# Allegro board radiotelescope.brd
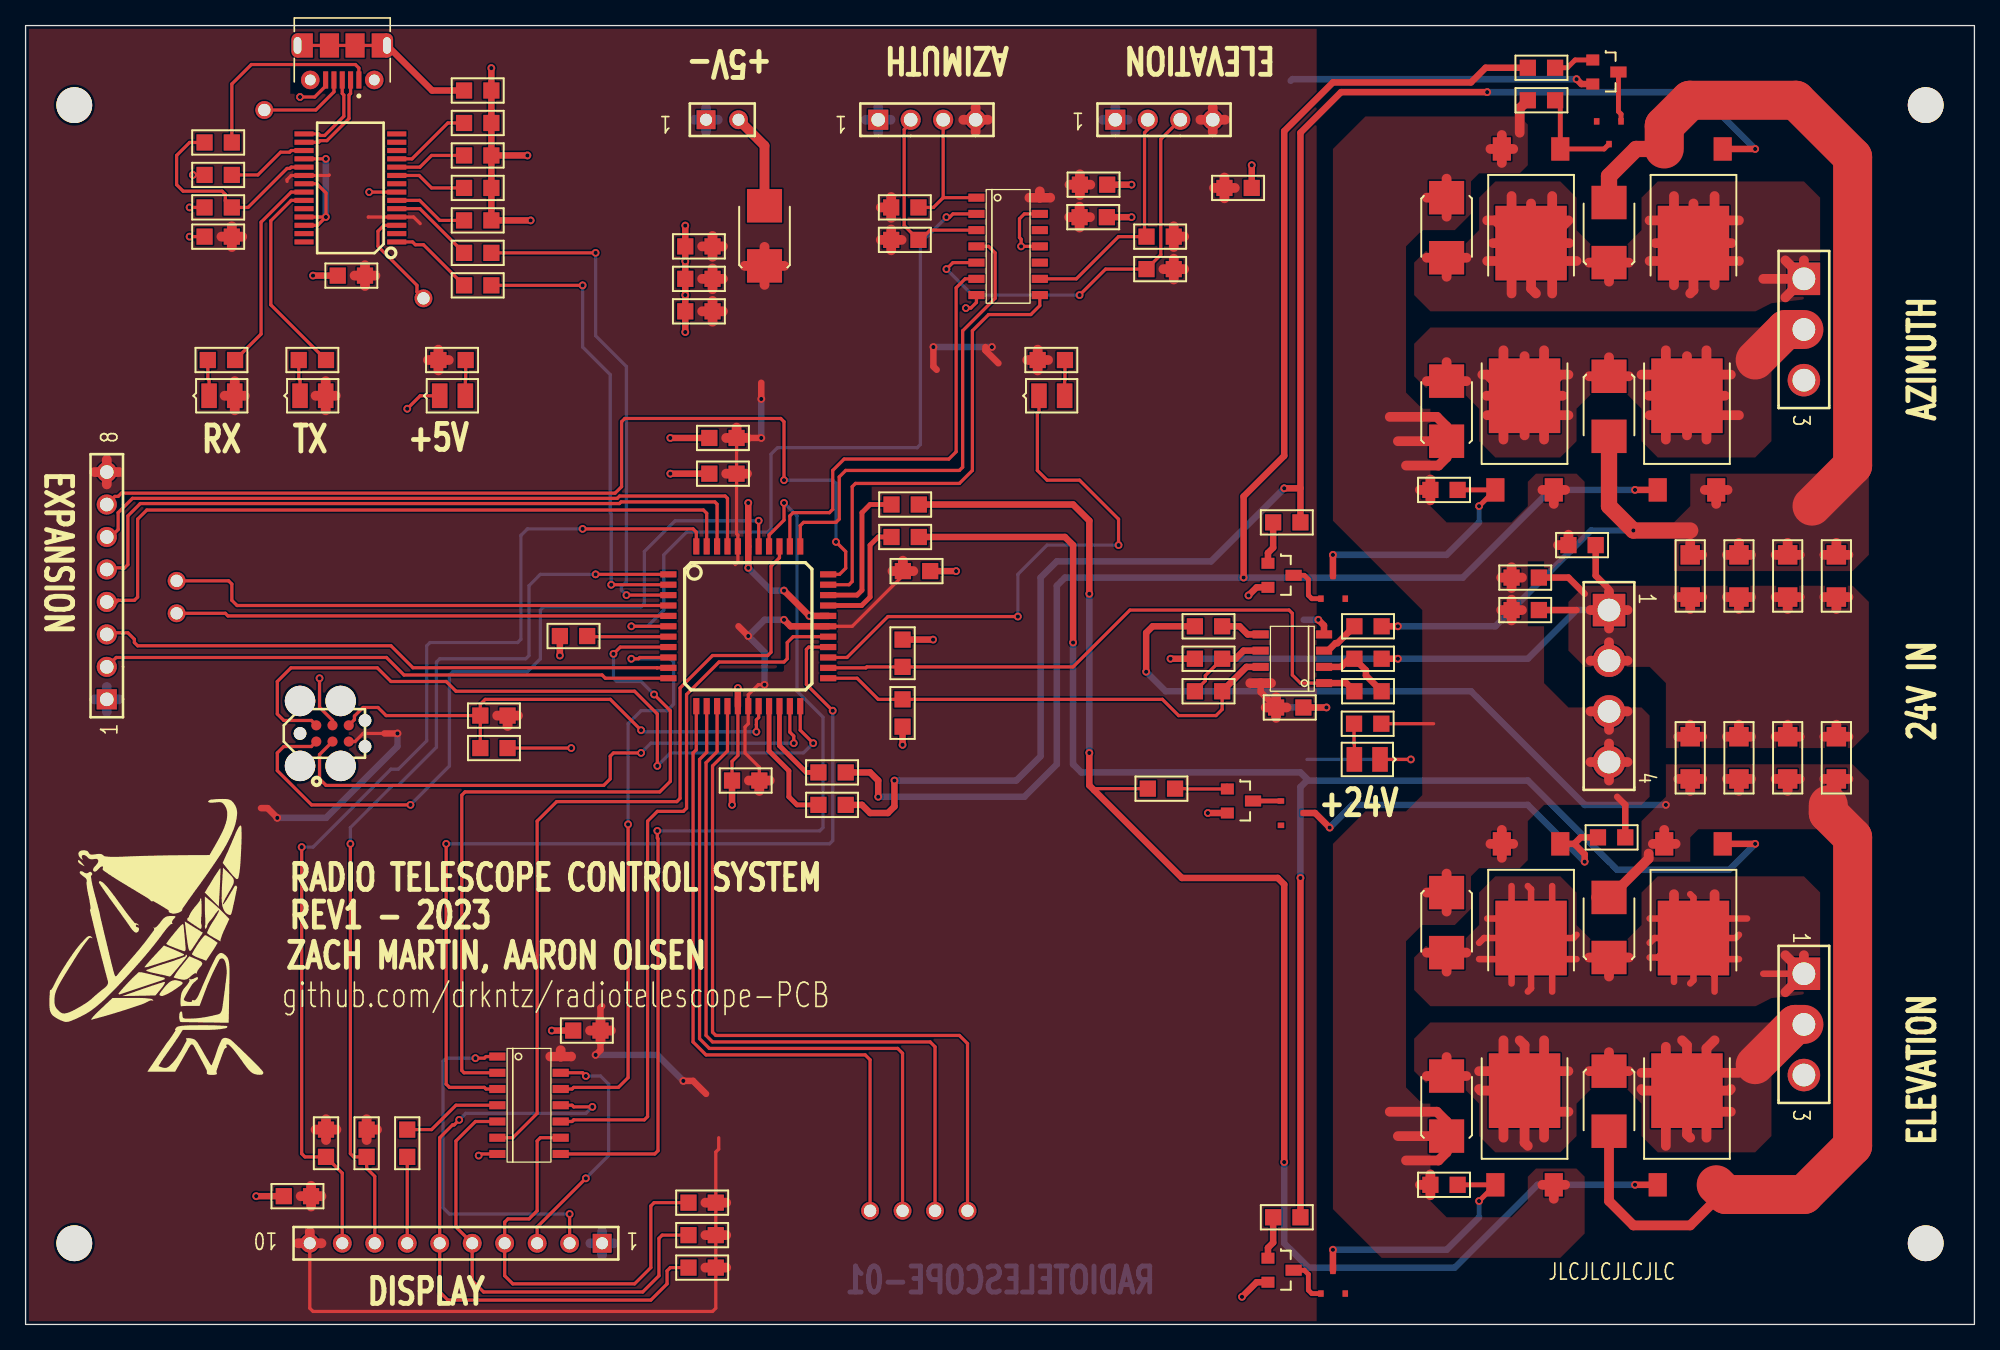
[diagram p0: board, top side]
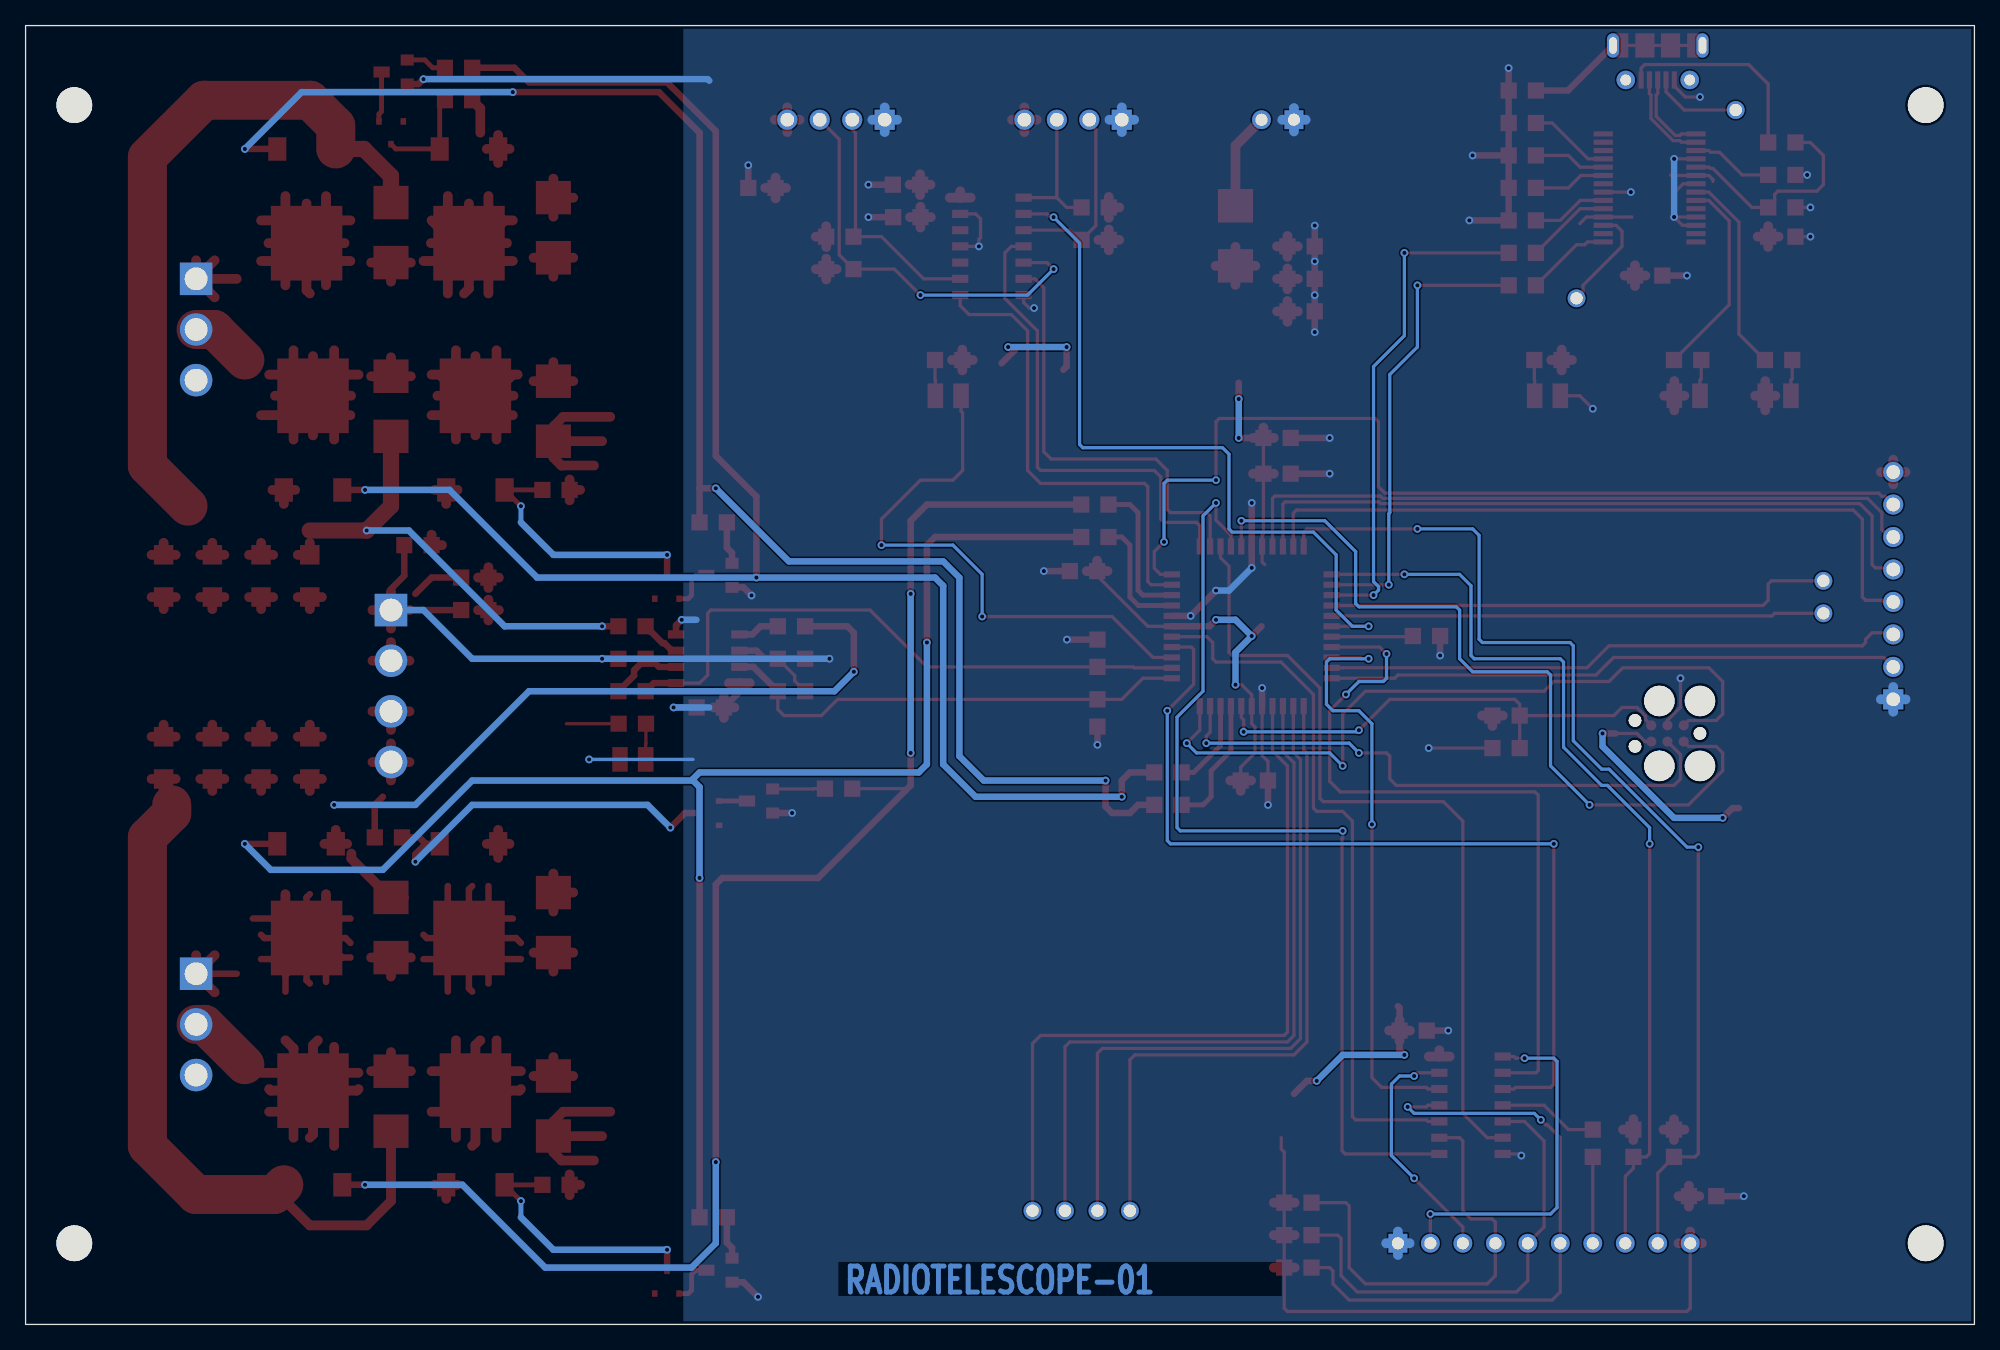
[diagram p1: board, bottom side, seen from below]

Outline 152.4 x 101.6 mm; copper layers: TOP, BOTTOM. Coordinates in mm from the lower left corner of the outline.
Outline path: rectangle 0,0 152.4,101.6

## Design rules (mm)
constraint set DEFAULT: min track width 0.152, pair gap 0.152
net group DP1: nets USB_D+ USB_D-
nets with their own width: min track width 0.508; nets AZ_CONTROL1

## Placement (name value [footprint] x y rotation side)
C1  10uF  [SMC0805]  95.88 88.9 180 top
C2  10uF  [SMC0805]  53.47 66.55 0 top
C3  100nF  [SMC0805]  53.47 69.34 0 top
C4  100nF  [SMC0805]  55.24 42.54 0 top
C5  100nF  [SMC0805]  70.74 58.93 180 top
C6  10uF  [SMC0805]  41.78 53.85 0 top
C7  100n  [SMC0805]  35.56 45.08 0 top
C8  10uF  [SMC0805]  84.58 89.15 180 top
C9  10uF  [SMC0805]  20.19 10.03 0 top
C10  100nF  [SMC0805]  26.54 82.04 180 top
C11  10uF  [SMC0805]  16.13 85.09 180 top
C12  100n  [SMC0805]  16.13 89.92 180 top
C13  100n  [SMC0805]  97.79 48.26 0 top
C14  100n  [SMC0805]  68.58 51.43 90 top
C15  100n  [SMC0805]  68.58 48.89 270 top
C16  100n  [SMC0805]  44.96 22.99 180 top
C17  100n  [SMC0805]  82.42 86.61 0 top
C20  10uF  [SMC0805]  53.72 79.25 180 top
C21  10uF  [SMC0805]  53.72 81.79 180 top
C22  10uF  [SMC0805]  53.72 84.33 180 top
C23  10uF  [SMC0805]  120.65 60.96 0 top
C24  10uF  [SMC0805]  116.2 58.42 0 top
C25  10uF  [SMC0805]  116.2 55.88 0 top
D1  RED  [SMD0805]  79.25 72.64 0 top
D2  RED  [SMD0805]  21.46 72.64 0 top
D3  RED  [SMD0805]  14.35 72.64 0 top
D4  BZX84C5V1/SOT  [SOT23]  123.83 93.22 270 top
D7  BZX84C5V1/SOT  [SOT23]  102.23 57.66 90 top
D10  BZX84C5V1/SOT  [SOT23]  99.06 40 0 top
D13  BZX84C5V1/SOT  [SOT23]  102.23 3.3 90 top
D17  SK24-TP  [SMDO214AA]  57.78 82.8 90 top
D18  GREEN  [SMD0805]  32.38 72.64 0 top
D19  SK24-TP  [SMDO214AA]  111.12 33.78 270 top
D20  SK24-TP  [SMDO214AA]  111.12 88.14 270 top
D21  SK24-TP  [SMDO214AA]  111.12 69.09 90 top
D22  SK24-TP  [SMDO214AA]  123.83 83.06 90 top
D23  SK24-TP  [SMDO214AA]  123.83 74.17 270 top
D24  SK24-TP  [SMDO214AA]  111.12 14.73 90 top
D25  SK24-TP  [SMDO214AA]  123.83 28.7 90 top
D26  SK24-TP  [SMDO214AA]  123.83 19.81 270 top
D27  GREEN  [SMD0805]  105.92 44.2 180 top
J1  TC2030-IDC-NL  [TAG_TC2030-IDC-NL]  24 46.23 0 top
J2  4-MTA-100  [BLKCON100VHTM1SQSW1004]  66.67 94.23 0 top
J3  4-MTA-100  [BLKCON100VHTM1SQSW1004]  85.22 94.23 0 top
J4  CON10  [BLKCON100VHTM1SQW10010]  45.09 6.35 180 top
J5  1050170001  [MOLEX_1050170001]  24.77 99.69 180 top
J6  3-MTA-156  [BLKCON156VHTM1SQSW1563]  139.06 81.79 270 top
J7  4-MTA-156  [BLKCON156VHTM1SQSW1564]  123.83 55.88 270 top
J8  3-MTA-156  [BLKCON156VHTM1SQSW1563]  139.06 27.43 270 top
J9  2-MTA-100  [BLKCON100VHTM1SQW1002]  53.21 94.23 0 top
J10  SPARE  [BLKCON100VHTM1SQSW1008]  6.35 48.89 90 top
NOREF  -  [unnamed]  148.59 6.35 0 top
NOREF#2  -  [unnamed]  3.81 6.35 0 top
NOREF#3  -  [unnamed]  3.81 95.38 0 top
NOREF#4  -  [#2]  0 0 90 top
NOREF#5  -  [#2]  0 101.6 0 top
NOREF#6  -  [#2]  0 101.6 0 top
NOREF#7  -  [#2]  0 0 90 top
NOREF#8  -  [#2]  11.81 29.97 0 top
NOREF#9  -  [#2]  0 0 90 top
NOREF#10  -  [unnamed]  148.59 95.38 0 top
NOREF#11  -  [#2]  0 101.6 0 top
Q1  IRFR5305  [SMDPAK]  120.02 91.95 180 top
Q2  IRFR5305  [SMDPAK]  114.94 65.28 0 top
Q3  MMBT4401LT1G  [SMSOT23BEC]  122.56 97.03 270 top
Q4  MMBT4401LT1G  [SMSOT23BEC]  97.16 57.66 270 top
Q5  IRFR4105  [SMDPAK]  132.72 91.95 180 top
Q6  IRFR4105  [SMDPAK]  127.63 65.28 0 top
Q7  IRFR5305  [SMDPAK]  120.02 37.59 180 top
Q8  IRFR5305  [SMDPAK]  114.94 10.92 0 top
Q9  MMBT4401LT1G  [SMSOT23BEC]  93.98 40 270 top
Q10  MMBT4401LT1G  [SMSOT23BEC]  97.16 3.3 270 top
Q11  IRFR4105  [SMDPAK]  132.72 37.59 180 top
Q12  IRFR4105  [SMDPAK]  127.63 10.92 0 top
R1  10k  [SMR0805]  35.56 47.62 0 top
R2  10k  [SMR0805]  67.69 87.38 0 top
R3  10k  [SMR0805]  67.69 84.84 0 top
R6  1k  [SMR0805]  81.28 75.44 180 top
R7  10k  [SMR0805]  89.79 82.55 180 top
R8  10k  [SMR0805]  89.79 85.09 180 top
R11  10k  [SMR0805]  26.67 15.24 270 top
R12  10k  [SMR0805]  23.49 15.24 270 top
R13  10k  [SMR0805]  53.97 4.45 180 top
R14  10k  [SMR0805]  53.97 6.98 180 top
R15  10k  [SMR0805]  53.97 9.52 180 top
R16  1k  [SMR0805]  29.84 15.24 270 top
R19  10k  [SMR0805]  16.13 87.38 180 top
R21  0R  [SMR0805]  34.29 81.28 0 top
R22  0R  [SMR0805]  34.29 83.82 0 top
R23  0R  [SMR0805]  34.29 93.98 0 top
R24  0R  [SMR0805]  34.29 88.9 0 top
R25  0R  [SMR0805]  34.29 91.44 0 top
R26  0R  [SMR0805]  34.29 86.36 0 top
R27  4.7k  [SMR0805]  23.49 75.44 180 top
R28  4.7k  [SMR0805]  16.38 75.44 180 top
R29  4.7k  [SMR0805]  16.13 92.46 180 top
R30  OMIT  [SMR0805]  34.29 96.52 0 top
R31  1k  [SMR0805]  117.47 95.76 0 top
R32  1k  [SMR0805]  109.85 65.28 0 top
R33  10k  [SMR0805]  117.47 98.3 0 top
R34  10k  [SMR0805]  99.69 62.74 180 top
R35  50mR  [SMR1206]  141.61 60.2 270 top
R36  50mR  [SMR1206]  137.8 60.2 270 top
R37  50mR  [SMR1206]  133.99 60.2 270 top
R38  50mR  [SMR1206]  130.18 60.2 270 top
R39  1k  [SMR0805]  106.05 54.61 180 top
R40  1k  [SMR0805]  106.05 52.07 180 top
R41  1k  [SMR0805]  125.09 38.1 180 top
R42  1k  [SMR0805]  109.85 10.92 0 top
R43  20k  [SMR0805]  106.05 49.53 180 top
R44  10k  [SMR0805]  87.76 41.91 0 top
R45  10k  [SMR0805]  99.69 8.38 180 top
R46  50mR  [SMR1206]  141.61 42.67 90 top
R47  50mR  [SMR1206]  137.8 42.67 90 top
R48  50mR  [SMR1206]  133.99 42.67 90 top
R49  50mR  [SMR1206]  130.18 42.67 90 top
R50  1k  [SMR0805]  91.44 54.61 0 top
R51  1k  [SMR0805]  91.44 52.07 0 top
R52  20k  [SMR0805]  91.44 49.53 0 top
R53  1k  [SMR0805]  34.42 75.44 180 top
R54  10k  [SMR0805]  103.89 46.99 0 top
R55  0R  [SMR0805]  64.14 40.64 180 top
R56  0R  [SMR0805]  64.14 43.18 180 top
R57  0R  [SMR0805]  69.85 61.59 180 top
R58  0R  [SMR0805]  69.85 64.13 180 top
TP1  RTS  [TP]  31.12 80.26 0 top
TP2  USB ID  [TP]  18.67 95 0 top
TP3  TP3  [TP]  66.04 8.89 0 top
TP4  TP3  [TP]  68.58 8.89 0 top
TP6  TP3  [TP]  11.81 58.17 0 top
TP7  TP3  [TP]  11.81 55.63 0 top
TP16  TP3  [TP]  71.12 8.89 0 top
TP17  TP3  [TP]  73.66 8.89 0 top
U1  PIC24FV32KA304_1  [PQFP44]  56.52 54.61 0 top
U2  FT232RL  [SSOP28-065-102X52MM]  25.4 88.9 90 top
U3  TLC27M2  [SOIC8]  99.06 52.07 180 top
U4  74HCT14  [SOIC14]  76.83 84.33 0 top
U5  74HCT14  [SOIC14]  39.37 17.14 0 top

## Library data of the parts
C1-C17 C20-C25 = C
D1 D3 D18 D27 = LED_3
D2 = LED_2
D4 D7 D10 D13 = BZX84C5V1/SOT_1
D17 D19-D26 = DIODE SCHOTTKY_1
J1 = TC2030-IDC-NL
J2 J3 J7 = 4 HEADER
J4 = CON10
J5 = 1050170001
J6 J8 = CON3
J9 = HEADER 2
J10 = CON8
Q1 Q2 Q7 Q8 = MOSFET P DGS_1
Q3 Q4 Q9 Q10 = 2N3904_0
Q5 Q6 Q11 Q12 = MOSFET N DGS_0
R1-R3 R6-R8 R11-R16 R19 R21-R58 = R
TP1-TP4 TP6 TP7 TP16 TP17 = TP_1
U1 = PIC24FV32KA304_0: Tolerance: ***; User Part Number: ***
U2 = INTERFACE-FT232RL
U3 = TLC27M2: Tolerance: ***; User Part Number: ***
U4 U5 = 74HCT14: Tolerance: ***; User Part Number: ***

## Footprints (pads in the part's own frame, mm; a bottom-side part is the same pattern mirrored in y, then rotated)
BLKCON100VHTM1SQSW1004
  rect 1.575x1.575 hole 1.067: 1(0,0)
  round 1.575 hole 1.067: 2(2.54,0) 3(5.08,0) 4(7.62,0)
BLKCON100VHTM1SQSW1008
  rect 1.575x1.575 hole 1.067: 1(0,0)
  round 1.575 hole 1.067: 2(2.54,0) 3(5.08,0) 4(7.62,0) 5(10.16,0) 6(12.7,0) 7(15.24,0) 8(17.78,0)
BLKCON100VHTM1SQW1002
  rect 1.473x1.473 hole 0.94: 1(0,0)
  round 1.473 hole 0.94: 2(2.54,0)
BLKCON100VHTM1SQW10010
  rect 1.473x1.473 hole 0.94: 1(0,0)
  round 1.473 hole 0.94: 2(2.54,0) 3(5.08,0) 4(7.62,0) 5(10.16,0) 6(12.7,0) 7(15.24,0) 8(17.78,0) 9(20.32,0) 10(22.86,0)
BLKCON156VHTM1SQSW1563
  rect 2.54x2.54 hole 1.778: 1(0,0)
  round 2.54 hole 1.778: 2(3.962,0) 3(7.925,0)
BLKCON156VHTM1SQSW1564
  rect 2.54x2.54 hole 1.778: 1(0,0)
  round 2.54 hole 1.778: 2(3.962,0) 3(7.925,0) 4(11.887,0)
MOLEX_1050170001
  rect 0.4x1.35 smd: 1(-1.3,2.35) 2(-0.65,2.35) 3(0,2.35) 4(0.65,2.35) 5(1.3,2.35)
  round 1.45 hole 0.85: SH1(-2.5,2.35) SH2(2.5,2.35)
  oval 0.95x1.9 hole 0.6x1.3: SH3(-3.5,-0.35) SH8(3.5,-0.35)
  rect 1.2x1.9 smd: SH4(-2.9,-0.35) SH7(2.9,-0.35)
  rect 1.5x1.9 smd: SH5(-1,-0.35) SH6(1,-0.35)
PQFP44
  rect 1.27x0.483 smd: 1(-6.248,4.064) 2(-6.248,3.251) 3(-6.248,2.438) 4(-6.248,1.626) 5(-6.248,0.813) 6(-6.248,0) 7(-6.248,-0.813) 8(-6.248,-1.626) 9(-6.248,-2.438) 10(-6.248,-3.251) 11(-6.248,-4.064) 23(6.248,-4.064) 24(6.248,-3.251) 25(6.248,-2.438) 26(6.248,-1.626) 27(6.248,-0.813) 28(6.248,0) 29(6.248,0.813) 30(6.248,1.626) 31(6.248,2.438) 32(6.248,3.251) 33(6.248,4.064)
  rect 0.483x1.27 smd: 12(-4.064,-6.248) 13(-3.251,-6.248) 14(-2.438,-6.248) 15(-1.626,-6.248) 16(-0.813,-6.248) 17(0,-6.248) 18(0.813,-6.248) 19(1.626,-6.248) 20(2.438,-6.248) 21(3.251,-6.248) 22(4.064,-6.248) 34(4.064,6.248) 35(3.251,6.248) 36(2.438,6.248) 37(1.626,6.248) 38(0.813,6.248) 39(0,6.248) 40(-0.813,6.248) 41(-1.626,6.248) 42(-2.438,6.248) 43(-3.251,6.248) 44(-4.064,6.248)
SMC0805
  rect 1.27x1.27 smd: 1(0,0) 2(2.134,0)
SMD0805
  rect 1.219x1.93 smd: A(2.007,0) C(0,0)
SMDO214AA
  rect 2.616x2.743 smd: A(4.699,0) C(0,0)
SMDPAK
  rect 1.422x1.829 smd: 1(0,0) 3(4.572,0)
  rect 5.588x5.842 smd: 4(2.286,7.366)
SMR0805
  rect 1.27x1.27 smd: 1(0,0) 2(2.134,0)
SMR1206
  rect 1.524x1.524 smd: 1(0,0) 2(3.302,0)
SMSOT23BEC
  rect 0.864x1.016 smd: B(-1.88,0) E(0,0)
  rect 0.864x1.27 smd: C(-0.94,2.007)
SOIC8
  rect 1.27x0.635 smd: 1(-2.477,1.905) 2(-2.477,0.635) 3(-2.477,-0.635) 4(-2.477,-1.905) 5(2.477,-1.905) 6(2.477,-0.635) 7(2.477,0.635) 8(2.477,1.905)
SOIC14
  rect 1.27x0.635 smd: 1(-2.477,3.81) 2(-2.477,2.54) 3(-2.477,1.27) 4(-2.477,0) 5(-2.477,-1.27) 6(-2.477,-2.54) 7(-2.477,-3.81) 8(2.477,-3.81) 9(2.477,-2.54) 10(2.477,-1.27) 11(2.477,0) 12(2.477,1.27) 13(2.477,2.54) 14(2.477,3.81)
SOT23
  rect 0.508x0.432 smd: 1(-0.889,0.94) 2(-0.889,-0.965) 3(0.889,0)
SSOP28-065-102X52MM
  rect 0.4x1.5 smd: 1(-4.225,-3.625) 2(-3.575,-3.625) 3(-2.925,-3.625) 4(-2.275,-3.625) 5(-1.625,-3.625) 6(-0.975,-3.625) 7(-0.325,-3.625) 8(0.325,-3.625) 9(0.975,-3.625) 10(1.625,-3.625) 11(2.275,-3.625) 12(2.925,-3.625) 13(3.575,-3.625) 14(4.225,-3.625) 15(4.225,3.625) 16(3.575,3.625) 17(2.925,3.625) 18(2.275,3.625) 19(1.625,3.625) 20(0.975,3.625) 21(0.325,3.625) 22(-0.325,3.625) 23(-0.975,3.625) 24(-1.625,3.625) 25(-2.275,3.625) 26(-2.925,3.625) 27(-3.575,3.625) 28(-4.225,3.625)
TAG_TC2030-IDC-NL
  round 2.375 hole 2.375: (-2.54,2.54) (-2.54,-2.54) (0.635,2.54) (0.635,-2.54)
  round 0.991 hole 0.991 unplated: (-2.54,0) (2.54,1.016) (2.54,-1.016)
  round 0.787 smd: 1(-1.27,-0.635) 2(-1.27,0.635) 3(0,-0.635) 4(0,0.635) 5(1.27,-0.635) 6(1.27,0.635)
TP
  round 1.397 hole 0.965: 1(0,0)
unnamed
  round 2.794 hole 2.794: 1(0,0)

## Nets
+5V: C1.2 C2.2 C3.2 C4.2 C5.2 C8.2 C9.2 C10.1 C11.1 C13.1 C16.1 C17.1 C20.1 C21.1 C22.1 D2.A D3.A D17.C J1.5 J2.4 J3.4 J4.10 J10.8 R1.2 R2.1 R3.1 R6.2 R7.1 R8.1 R11.1 R12.1 R13.1 R14.1 R15.1 R53.2 U1.17 U1.28 U1.40 U2.4(VCCIO) U2.20 U3.8 U4.14 U5.14
+24V: C23.1 C24.1 C25.1 D19.C D20.C D21.C D24.C J7.3 J7.4 Q1.3(S) Q2.3(S) Q7.3(S) Q8.3(S) R31.1 R32.1 R41.1 R42.1 R54.2
0: C1.1 C2.1 C3.1 C4.1 C5.1 C6.1 C7.2 C8.1 C9.1 C10.2 C11.2 C12.2 C13.2 C14.2 C15.2 C16.2 C17.2 C20.2 C21.2 C22.2 C23.2 C24.2 C25.2 D18.C D27.C J1.4 J2.1 J3.1 J4.1 J5.5 J7.1 J7.2 J9.1 J10.1 Q3.E Q4.E Q9.E Q10.E R19.2 R23.2 R24.2 R25.2 R26.2 R30.2 R35.2 R36.2 R37.2 R38.2 R40.1 R46.2 R47.2 R48.2 R49.2 R51.1 U1.16 U1.29 U1.39 U2.7 U2.18 U2.21 U2.25 U2.26 U3.4 U4.7 U4.11 U4.13 U5.7
/MCLR: C7.1 J1.6 R1.1 U1.18(\\M\C\L\R\/RA5)
AUX1: U1.8 U5.2
AUX2: U1.9 U5.12(Y)
AZ_CONTROL1: Q5.1 R34.1 R55.1
AZ_CONTROL2: Q6.1 R33.1 R56.1
AZ_CURRENT: C14.1 R43.2 U1.24 U3.1
AZ_ENCODER1: U1.34 U4.4
AZ_ENCODER2: U1.6 U4.2
AZ_M+: D21.A D23.C J6.2 Q2.4 Q6.4
AZ_M-: D20.A D22.C J6.1 Q1.4 Q5.4
BUTTON1: U1.27 U5.10
BUTTON2: U1.36 U5.6
BUTTON3: U1.37 U5.8
DIAGS: J1.1 U1.38
EL_CONTROL1: Q11.1 R45.1 R57.1
EL_CONTROL2: Q12.1 R44.1 R58.1
EL_CURRENT: C15.1 R52.2 U1.23 U3.7(OUT)
EL_ENCODER1: U1.32 U4.8
EL_ENCODER2: U1.35 U4.6
EL_M+: D24.A D26.C J8.2 Q8.4 Q12.4
EL_M-: D19.A D25.C J8.1 Q7.4 Q11.4
EXT_LED: U1.26 U5.3
FT232_NRST: R19.1 R29.2 U2.19
I2C_CLK: J4.9 R12.2 U1.44
I2C_DAT: J4.8 R11.2 U1.1
NAZ_CONTROL1: R55.2 U1.19
NAZ_CONTROL2: R56.2 U1.20
NEL_CONTROL1: R57.2 U1.30
NEL_CONTROL2: R58.2 U1.31
NSTAT_LED: D1.C U1.25
PGC/U2RX: J1.2 U1.22
PGD/U2TX: J1.3 U1.21
RX_FROM_PC: R21.2 U1.2
SAFETY_GND: J6.3 J8.3
TX_TO_PC: R22.2 U1.3
USB_D+: J5.3 U2.15
USB_D-: J5.2 U2.16
N09584: C6.2 U1.7
N10882: R21.1 U2.1
N10888: R22.1 U2.5
N11711: C12.1 U2.17
N15288: J5.1 R29.1
N17212: R27.1 U2.23
N17635: R28.1 U2.22
N18224: TP1.1 U2.3
N18573: D3.C R28.2
N19574: J5.4 TP2.1
N20299: J5.SH1 J5.SH2 J5.SH3 J5.SH4 J5.SH5 J5.SH6 J5.SH7 J5.SH8(SHIELD__7) R30.1
N21472: R23.1 U2.11
N21714: R24.1 U2.9
N21744: R25.1 U2.10
N21774: R26.1 U2.6
N22307: D2.C(CATHODE) R27.2
N32112: D22.A D23.A Q5.3(S) Q6.3(S) R35.1 R36.1 R37.1 R38.1 R39.1
N33531: R40.2 R43.1 U3.2
N33654: R39.2 U3.3
N38974: D4.3(CATHODE) Q1.1 R31.2
N39239: D7.3(CATHODE) Q2.1 R32.2
N40124: Q4.B R34.2
N43524: D10.3(CATHODE) Q7.1 R41.2
N43572: D13.3(CATHODE) Q8.1 R42.2
N43662: Q10.B R45.2
N43806: D25.A D26.A Q11.3(S) Q12.3(S) R46.1 R47.1 R48.1 R49.1 R50.1
N43998: R50.2 U3.5
N44064: R51.2 R52.1 U3.6
N46355: D4.1 Q3.C
N46827: D7.1 Q4.C
N47330: D10.1 Q9.C
N47554: D13.1 Q10.C
N52322: J2.3 R2.2 U4.1
N52332: J2.2 R3.2 U4.3
N53909: J3.3 R7.2 U4.5
N53913: J3.2 R8.2 U4.9
N58839: R16.1 U5.4
N59824: J4.7 R16.2
N60320: J4.6 R13.2 U5.11
N60420: J4.5 R14.2 U5.5
N60515: J4.4 R15.2 U5.9
N87563: D1.A R6.1
N90499: D17.A J9.2
N92108: D18.A R53.1
N94087: D27.A R54.1
N100934: TP3.1 U1.12
N100938: TP4.1 U1.13
N101010: TP6.1 U1.4
N101014: TP7.1 U1.5
N101036: J10.7 U1.33
N101076: J10.6 U1.41
N101098: J10.5 U1.42
N101120: J10.4 U1.43
N101276: J10.3 U1.10
N101280: J10.2 U1.11
N101284: TP16.1 U1.14
N101288: TP17.1 U1.15
N120965: Q3.B R33.2
N120971: Q9.B R44.2
N126718: J4.2 U5.1
N126733: J4.3 U5.13

Pads without a net: D4 2; D7 2; D10 2; D13 2; NOREF 1; NOREF#2 1; NOREF#3 1; NOREF#10 1; U2 2 8 12 13 14 24 27 28; U4 10 12

## Via types
v1: diameter 0.61, hole 0.33, TOP to BOTTOM, 120 vias

## Routing (per net, layer and track width the routed paths; a pad name or vN(x,y) marks a point on that pad's centre or on a via; arc(x,y) is an arc through that point)
+5V: length 253.5
  TOP w0.254: C5.2 68.61,58.57 64.64,54.61 U1.28 ; 23.75,89.92 23.71,89.88 U2.20 20.77,89.88 20.45,89.55 20.45,89.41 ; 55.5,59.44 55.7,59.64 U1.40 55.7,61.75 55.6,61.85 C2.2 C3.2 ; J1.5 25.76,45.59 26.39,46.23 27.81,46.23 ; C4.2 57.38,43.59 56.26,44.7 56.26,46.74 56.52,46.99 U1.17 56.52,49.25 57.3,50.04 v1(57.78,50.04) ; 30.86,86.11 30.34,86.62 U2.4 26.81,86.62 26.8,86.61 ; 54.2,14.6 54.2,13.72 53.97,13.49 R15.1 R14.1 R13.1 53.97,1.27 53.72,1.02 22.48,1.02 22.23,1.27 J4.10
  TOP w0.508: 96.58,50.16 96.58,49.47 C13.1 ; 44.96,22.17 44.96,21.46 v1(44.58,21.08) ; v1(59.31,55.12) 59.82,54.61 U1.28 ; v1(57.53,72.39) 57.53,73.66 ; 71.25,74.68 70.99,74.93 v1(70.99,76.45) ; v1(19.69,39.62) 18.92,40.39 18.41,40.39 ; v1(51.44,19.05) 52.2,19.05 53.21,18.03 ; 75.06,76.45 75.06,76.2 76.07,75.18 ; 56.41,69.34 v1(57.53,69.34) ; 28.07,46.23 v1(29.08,46.23) ; 44.96,23.8 44.96,24.76 45.09,24.89 ; v1(56.52,53.85) 55.75,54.61
  TOP w0.762: C22.1 54.53,84.33 ; C22.1 53.72,85.14 ; C22.1 53.72,83.51 ; C22.1 52.91,84.33 ; 54.79,4.45 R13.1 53.16,4.45 ; 54.79,69.34 C3.2 ; C3.2 56.41,69.34 ; C3.2 55.6,70.16 ; R8.1 89.79,85.9 ; R8.1 89.79,84.28 ; R8.1 90.6,85.09 ; 6.35,65.71 J10.8 ; J10.8 6.35,67.64 ; J10.8 7.32,66.67 ; J10.8 5.38,66.67 ; C21.1 54.53,81.79 ; C21.1 53.72,82.6 ; C21.1 53.72,80.97 ; C21.1 52.91,81.79 ; C17.1 83.24,86.61 ; C17.1 82.42,85.8 ; C17.1 81.61,86.61 ; C17.1 82.42,87.43 ; U4.14 80.12,88.14 ; U4.14 79.31,88.63 ; U4.14 78.5,88.14 ; 22.68,15.24 R12.1 ; R12.1 23.49,14.43 ; R12.1 23.49,16.05 ; R12.1 24.31,15.24 ; C11.1 16.94,85.09 ; C11.1 16.13,85.9 ; C11.1 16.13,84.28 ; C11.1 15.32,85.09 ; R3.1 67.69,85.65 ; R3.1 68.5,84.84 ; R3.1 66.88,84.84 ; R3.1 67.69,84.02 ; 92.94,88.9 C1.2 ; C1.2 94.56,88.9 ; C1.2 93.75,88.09 ; C1.2 93.75,89.71 ; C20.1 53.72,80.06 ; C20.1 52.91,79.25 ; C20.1 54.53,79.25 ; C20.1 53.72,78.43 ; 57.38,41.73 C4.2 ; C4.2 56.57,42.54 ; C4.2 58.19,42.54 ; 54.79,9.52 R15.1 53.16,9.52 ; R11.1 27.48,15.24 ; R11.1 26.67,14.43 ; R11.1 26.67,16.05 ; R1.2 38.51,47.62 ; R1.2 36.88,47.62 ; R1.2 37.69,46.81 ; 67.69,86.56 R2.1 ; R2.1 67.69,88.19 ; R2.1 66.88,87.38 ; 44.96,22.17 C16.1 ; C16.1 44.96,23.8 ; C16.1 44.14,22.99 ; C16.1 45.77,22.99 ; J2.4 75.26,94.23 ; J2.4 74.3,95.2 ; J2.4 73.33,94.23 ; J2.4 74.3,93.27 ; 53.16,6.98 R14.1 54.79,6.98 ; 97.79,47.45 C13.1 ; C13.1 97.79,49.07 ; C13.1 98.6,48.26 ; C13.1 96.98,48.26 ; 22.68,72.64 D2.A ; D2.A 24.26,72.64 ; D2.A 23.47,71.5 ; D2.A 23.47,73.79 ; 31.47,75.44 R53.2 ; R53.2 33.1,75.44 ; R53.2 32.28,74.62 ; R53.2 32.28,76.25 ; 26.54,81.23 C10.1 ; C10.1 26.54,82.86 ; C10.1 25.73,82.04 ; C10.1 27.36,82.04 ; 57.78,81.32 D17.C ; D17.C 56.24,82.8 ; D17.C 57.78,84.29 ; D17.C 59.33,82.8 ; R7.1 90.6,82.55 ; R7.1 88.98,82.55 ; R7.1 89.79,83.36 ; R7.1 89.79,81.74 ; J3.4 93.8,94.23 ; J3.4 91.87,94.23 ; J3.4 92.84,95.2 ; J3.4 92.84,93.27 ; 95.77,50.16 97.4,50.16 ; 67.79,58.93 C5.2 ; C5.2 68.61,59.74 ; C5.2 69.42,58.93 ; 81.64,89.15 C8.2 ; C8.2 82.45,88.34 ; C8.2 83.26,89.15 ; C8.2 82.45,89.97 ; D3.A 16.36,73.79 ; D3.A 15.57,72.64 ; D3.A 17.15,72.64 ; D3.A 16.36,71.5 ; R6.2 79.96,75.44 ; R6.2 79.15,76.25 ; R6.2 78.33,75.44 ; R6.2 79.15,74.62 ; 54.79,66.55 C2.2 56.41,66.55 ; J4.10 23.14,6.35 ; J4.10 21.31,6.35 ; J4.10 22.23,7.26 ; 41.85,20.95 42.66,20.95 ; 41.85,20.95 41.85,21.45 ; 41.85,20.95 41.03,20.95 ; 21.51,10.03 C9.2 ; C9.2 22.33,10.85 ; C9.2 23.14,10.03 ; C9.2 22.33,9.22
  BOTTOM w0.508: v1(29.08,46.23) 29.08,45.21 23.49,39.62 v1(19.69,39.62) ; v1(59.31,55.12) 57.78,55.12 v1(56.52,53.85) 57.78,52.58 v1(57.78,50.04) ; v1(70.99,76.45) v1(75.56,76.45) ; v1(57.53,69.34) v1(57.53,72.39) ; v1(51.44,19.05) 49.4,21.08 v1(44.58,21.08)
+24V: length 85
  TOP w0.254: R54.2 110.11,46.99
  TOP w0.508: 124.46,41.27 125.09,40.64 R41.1
  TOP w0.762: 109.58,33.78 D19.C ; D19.C 111.12,35.27 ; D19.C 111.12,32.3 ; Q1.3 115.44,93.04 ; Q1.3 115.44,90.86 ; Q1.3 114.55,91.95 ; Q1.3 116.33,91.95 ; 119.84,60.96 C23.1 120.65,61.77 ; 109.04,65.28 R32.1 ; R32.1 109.85,66.09 ; R32.1 109.85,64.46 ; D24.C 111.12,13.46 110.49,12.83 107.95,12.83 ; D24.C 107.31,14.73 ; D24.C 111.12,15.88 110.36,16.64 106.68,16.64 ; 118.62,10.92 Q8.3 ; Q8.3 120.4,10.92 ; Q8.3 119.51,9.83 ; Q7.3 116.33,37.59 ; Q7.3 115.44,38.68 ; Q7.3 114.55,37.59 ; Q7.3 115.44,36.5 ; 122.38,43.99 J7.4 ; J7.4 123.83,45.44 ; J7.4 125.27,43.99 ; J7.4 123.83,42.54 ; 116.2,57.61 C24.1 ; C24.1 115.39,58.42 ; C24.1 116.2,59.23 ; C24.1 117.02,58.42 ; 107.95,67.18 110.49,67.18 111.12,67.82 D21.C ; 109.58,88.14 D20.C ; D20.C 111.12,86.65 ; D20.C 111.12,89.62 ; C25.1 116.2,56.69 ; C25.1 116.2,55.07 ; C25.1 115.39,55.88 ; C25.1 117.02,55.88 ; Q2.3 120.4,65.28 ; Q2.3 119.51,64.19 ; Q2.3 118.62,65.28 ; 122.38,47.96 J7.3 ; J7.3 123.83,46.51 ; J7.3 125.27,47.96 ; D21.C 111.12,70.23 110.36,70.99 106.68,70.99 ; D21.C 107.31,69.09 ; R42.1 109.85,11.74 ; R42.1 109.04,10.92 ; R42.1 109.85,10.11 ; R31.1 116.84,95.12 116.84,93.22
0: length 264.7
  TOP w0.254: U2.7 v1(26.87,88.57) ; C4.1 55.24,44.04 55.7,44.5 U1.16 ; 24,46.86 24,47.26 22.99,48.27 v1(22.99,50.55) ; U4.7 74.36,79.95 73.91,79.5 v1(73.53,79.5) ; C12.2 v1(13.08,89.92) ; U4.13 78.11,86.87 77.72,86.49 77.72,85.01 77.85,84.89 v1(77.85,84.33) U4.11 ; U5.7 35.56,13.33 v1(35.43,13.21) ; D18.C 30.86,72.64 v1(29.84,71.63) ; C11.2 v1(12.83,85.09) ; 23.49,86.61 23.49,88.51 22.78,89.23 U2.21 ; C7.2 v1(42.67,45.08) ; U2.18 v1(23.48,91.18) ; D27.C v1(108.33,44.2) ; v1(21.46,96.01) 22.61,96.01 23.47,96.87 J5.5 ; U2.26 22.83,85.97 v1(23.48,86.62) U2.25 ; R19.2 v1(12.83,87.38)
  TOP w0.508: Q3.E 121.67,97.03 v1(121.28,97.41) ; C4.1 v1(55.24,40.64) ; R25.2 v1(39.24,91.44) ; R25.2 R24.2 R26.2 v1(39.5,86.36) ; R25.2 R23.2 R30.2 v1(36.42,98.27) ; C10.2 v1(22.48,82.04) ; 121.92,57.15 120.65,58.42 C24.2 ; v1(95.12,2.16) 96.27,3.3 Q10.E ; U1.16 v1(55.7,49.78) ; C2.1 v1(50.42,66.55) ; C3.1 v1(50.42,69.34) ; C6.1 v1(41.78,52.32) ; C8.1 v1(86.49,89.15) ; v1(101.09,55.12) 101.54,54.67 U3.4 ; C15.2 v1(68.58,45.34) ; v1(51.59,77.62) C20.2 v1(51.59,80.52) C21.2 v1(51.59,83.16) C22.2 v1(51.59,85.95) ; C9.1 v1(18.03,10.03) ; v1(95.63,57.02) 96.27,57.66 Q4.E ; C17.2 v1(86.49,86.61) ; C25.2 121.28,55.88 ; v1(89.53,52.07) R51.1 ; C14.2 v1(70.97,53.57) ; C13.2 v1(101.73,48.26) ; Q9.E v1(92.46,40) ; v1(59.31,57.4) v1(61.29,55.42) U1.29 ; C16.2 v1(41.15,22.99) ; C1.1 v1(95.88,90.68) ; v1(107.31,52.07) R40.1 ; v1(56.52,59.18) U1.39 v1(56.52,64.26) ; C23.2 122.78,58.57 123.83,57.53 ; C5.1 v1(72.77,58.93)
  TOP w0.762: 140.66,45.97 R46.2 ; R46.2 142.55,45.97 ; R46.2 141.61,46.91 ; R47.2 138.74,45.97 ; R47.2 137.8,46.91 ; R47.2 136.85,45.97 ; 133.04,45.97 R48.2 ; R48.2 134.93,45.97 ; R48.2 133.99,46.91 ; R38.2 131.12,56.9 ; R38.2 130.18,55.96 ; R38.2 129.23,56.9 ; 141.61,55.96 R35.2 ; R35.2 142.55,56.9 ; R35.2 140.66,56.9 ; J7.2 125.27,51.92 ; J7.2 122.38,51.92 ; J7.2 123.83,53.37 ; R49.2 130.18,46.91 ; R49.2 131.12,45.97 ; R49.2 129.23,45.97 ; J7.1 123.83,57.33 ; J7.1 123.83,54.43 ; J7.1 125.27,55.88 ; J7.1 122.38,55.88 ; 136.85,56.9 R36.2 ; R36.2 137.8,55.96 ; R36.2 138.74,56.9 ; R37.2 134.93,56.9 ; R37.2 133.04,56.9 ; R37.2 133.99,55.96
  BOTTOM w0.254: v1(108.33,44.2) 100.2,44.2
  BOTTOM w0.508: v1(59.31,57.4) 58.29,57.4 v1(56.52,59.18) ; v1(121.28,97.41) 99.06,97.41 98.93,97.28 ; v1(101.73,48.26) 98.93,48.26 ; v1(89.53,52.07) v1(107.31,52.07) 117.47,52.07 121.28,55.88 J7.1 ; v1(101.09,55.12) 99.95,55.12 ; v1(23.48,91.18) v1(23.48,86.62)
  BOTTOM w0.762: J3.1 86.18,94.23 ; J3.1 85.22,95.2 ; J3.1 84.25,94.23 ; J3.1 85.22,93.27 ; 44.17,6.35 J4.1 ; J4.1 46,6.35 ; J4.1 45.09,5.44 ; J4.1 45.09,7.26 ; 66.67,93.27 J2.1 ; J2.1 65.71,94.23 ; J2.1 66.67,95.2 ; J2.1 67.64,94.23 ; J10.1 7.32,48.89 ; J10.1 6.35,47.93 ; J10.1 6.35,49.86 ; J10.1 5.38,48.89 ; 52.3,94.23 J9.1 ; J9.1 53.21,95.15 ; J9.1 53.21,93.32 ; J9.1 54.13,94.23
/MCLR: length 39.6
  TOP w0.254: v1(48.13,46.48) 45.72,48.89 35.94,48.89 35.56,48.51 R1.1 ; R1.1 28.19,47.62 27.56,48.26 26.39,48.26 25.72,47.59 25.72,47.31 25.27,46.86 ; R1.1 C7.1 ; v1(57.15,46.35) 57.15,46.91 57.15,46.92 57.15,47.29 57.33,47.47 U1.18
  BOTTOM w0.254: v1(57.15,46.35) 48.26,46.35 v1(48.13,46.48)
AUX1: length 58.6
  TOP w0.254: U1.8 46.51,52.98 v1(45.97,52.45) ; v1(49.15,49.28) 50.42,48.01 50.42,42.48 49.59,41.66 34.36,41.66 34.11,41.4 34.11,19.86 34.29,19.68 U5.2
  BOTTOM w0.254: v1(49.15,49.28) 48.13,50.29 46.23,50.29 45.97,50.55 v1(45.97,52.45)
AUX2: length 47.2
  TOP w0.254: v1(47.12,39.12) 47.12,19.3 46.36,18.54 42.86,18.54 42.74,18.41 U5.12 ; U1.9 48.03,52.17 47.93,52.07 v1(47.37,52.07)
  BOTTOM w0.254: v1(47.12,39.12) 47.12,46.99 48.13,48.01 50.16,48.01 50.67,48.51 50.67,51.82 50.42,52.07 v1(47.37,52.07)
AZ_CONTROL1: length 127.5
  TOP w0.508: v1(98.42,65.41) 99.69,65.41 ; 99.69,65.41 99.69,93.22 102.87,96.39 v1(114.3,96.39) ; 99.69,65.41 R34.1 ; v1(67.94,42.54) 67.94,40.51 67.44,40 66.04,40 65.41,40.64 R55.1 ; v1(135.25,91.95) Q5.1
  BOTTOM w0.508: v1(98.42,65.41) 92.71,59.69 80.64,59.69 79.38,58.42 79.38,44.45 77.47,42.54 v1(67.94,42.54) ; v1(135.25,91.95) 130.81,96.39 v1(114.3,96.39)
AZ_CONTROL2: length 140.5
  TOP w0.508: Q6.1 v1(125.86,65.28) ; R56.1 66.04,43.18 66.67,42.54 v1(66.67,41.27) ; R33.1 114.17,98.3 113.03,97.16 102.23,97.16 98.42,93.34 98.42,67.94 95.25,64.77 v1(95.25,58.42)
  BOTTOM w0.508: v1(66.67,41.27) 78.11,41.27 80.64,43.81 80.64,57.78 81.28,58.42 v1(95.25,58.42) 112.39,58.42 119.25,65.28 v1(125.86,65.28)
AZ_CURRENT: length 48.5
  TOP w0.254: U1.24 65.71,51.36 65.79,51.43 C14.1 81.91,51.43 86.36,55.88 98.81,55.88 99.06,55.63 99.06,50.8 99.69,50.16 U3.1
  TOP w0.508: U3.1 103.28,50.16 R43.2
AZ_ENCODER1: length 37.6
  TOP w0.254: U4.4 75.31,84.33 75.82,83.82 75.82,80.26 73.28,77.72 73.28,67.06 73.03,66.8 64.14,66.8 63.63,66.29 63.63,62.99 63.37,62.74 60.83,62.74 60.58,62.48 U1.34
AZ_ENCODER2: length 58.4
  TOP w0.254: v1(72.01,86.61) 72.26,86.61 72.52,86.87 U4.2 ; U1.6 v1(47.37,54.61)
  BOTTOM w0.254: v1(47.37,54.61) 48.64,54.61 49.91,55.88 49.91,60.2 51.69,61.98 58.04,61.98 58.29,62.23 58.29,68.07 58.8,68.58 69.72,68.58 69.98,68.83 69.98,84.58 v1(72.01,86.61)
AZ_M+: length 93.4
  TOP w0.762: 126.95,72.64 129.16,72.64 ; 129.16,72.64 129.29,72.64 ; 129.16,72.64 127.63,71.12 127,71.12 ; 130.56,72.64 132.08,71.12 133.99,71.12 ; 130.56,72.64 132.89,72.64 ; 130.56,72.64 130.43,72.64 ; 129.29,72.64 128.27,73.66 ; 129.29,72.64 129.79,72.64 ; 128.27,73.66 127.63,74.3 126.37,74.3 ; 128.27,73.66 128.27,76.2 ; 114.3,71.12 115.57,71.12 117.09,72.64 ; Q2.4 117.22,72.14 ; Q2.4 117.86,72.64 ; Q2.4 117.22,72.77 ; Q2.4 117.09,72.64 ; Q2.4 115.57,74.3 115.57,76.2 ; 117.22,72.14 115.57,70.48 115.57,69.22 ; 117.22,72.14 117.22,72.01 ; 117.09,72.64 115.95,72.64 ; 117.22,72.01 118.75,70.48 118.75,69.22 ; 117.22,72.01 117.22,69.54 ; 129.92,69.54 Q6.4 ; Q6.4 129.92,75.74 ; Q6.4 130.43,72.64 ; Q6.4 129.79,72.64 ; Q6.4 131.44,71.12 131.44,69.22 ; 115.95,72.64 114.3,74.3 113.92,74.3 ; 115.95,72.64 114.25,72.64 ; 117.22,72.77 118.75,74.3 118.75,76.2 ; 117.22,72.77 117.22,75.74 ; D23.C 125.37,74.17 ; D23.C 122.28,74.17 ; D23.C 123.83,75.65 ; D21.A 112.67,73.79 ; D21.A 111.12,75.27 ; D21.A 109.58,73.79 ; 130.43,72.64 131.44,73.66 ; 131.44,73.66 131.44,76.2 ; 131.44,73.66 132.08,74.3 133.35,74.3 ; 117.86,72.64 119.38,71.12 120.65,71.12 ; 117.86,72.64 118.36,72.64 ; 118.36,72.64 120.02,74.3 120.65,74.3 ; 118.36,72.64 120.19,72.64 ; 129.79,72.64 128.27,71.12 128.27,69.22
  TOP w3.048: 135.25,75.44 137.64,77.83 J6.2
AZ_M-: length 101.4
  TOP w0.762: 130.43,84.07 128.91,82.55 128.91,81.28 ; 130.43,84.07 130.43,84.2 ; 130.43,84.07 130.43,80.9 130.18,80.64 ; Q5.4 133.4,84.58 ; Q5.4 130.43,84.2 ; Q5.4 130.43,84.71 ; Q5.4 130.3,84.58 ; Q1.4 117.73,84.84 ; Q1.4 118.24,84.58 ; Q1.4 116.97,84.58 ; Q1.4 117.73,84.2 ; 117.73,84.84 117.73,85.34 ; 117.73,84.84 116.2,86.36 116.2,88.27 ; 121.28,83.19 120.02,83.19 118.62,84.58 ; 117.73,85.34 119.38,87 119.38,88.27 ; 117.73,85.34 117.73,87.68 ; 127.46,84.58 130.05,84.58 ; 130.05,84.58 130.3,84.58 ; 130.05,84.58 128.27,86.36 127,86.36 ; 130.43,84.71 130.43,85.34 ; 130.43,84.71 132.08,86.36 133.99,86.36 ; 130.43,85.34 132.08,87 132.08,88.27 ; 130.43,85.34 130.43,85.47 ; 130.43,84.2 131.44,83.19 ; 117.73,84.07 117.73,81.03 118.11,80.64 ; 117.73,84.07 116.2,82.55 116.2,80.64 ; 117.73,84.07 117.73,84.2 ; 130.3,84.58 128.91,83.19 127,83.19 ; 122.28,83.06 D22.C ; D22.C 123.83,81.57 ; D22.C 125.37,83.06 ; J6.1 135.89,81.79 ; J6.1 137.62,83.24 ; J6.1 137.62,80.34 ; J6.1 139.06,83.24 ; 118.62,84.58 118.24,84.58 ; 118.62,84.58 120.7,84.58 ; 116.97,84.58 116.71,84.58 ; 116.97,84.58 115.57,83.19 114.3,83.19 ; 116.71,84.58 114.76,84.58 ; 116.71,84.58 114.94,86.36 114.3,86.36 ; 118.24,84.58 119.38,85.72 120.02,85.72 120.65,86.36 ; 111.12,81.95 D20.A ; D20.A 109.58,83.44 ; D20.A 112.67,83.44 ; 119.38,80.64 119.38,82.55 117.73,84.2 ; 130.43,85.47 128.91,87 128.91,88.27 ; 130.43,85.47 130.43,87.68 ; 132.08,81.28 132.08,82.55 131.44,83.19 ; 133.99,83.19 131.44,83.19
BUTTON1: length 56.1
  TOP w0.254: U1.27 60.02,53.8 59.56,53.34 59.56,52.07 59.31,51.82 54.23,51.82 51.69,49.28 51.69,40.39 51.43,40.13 49.4,40.13 48.64,39.37 48.64,16.26 48.39,16 42.86,16 42.74,15.88 41.85,15.88
BUTTON2: length 64.1
  TOP w0.254: U1.36 58.95,59.97 58.29,59.31 58.29,52.58 58.04,52.32 53.72,52.32 51.18,49.78 51.18,41.15 50.93,40.89 41.53,40.89 40,39.37 40,16.51 38.1,14.6 U5.6
BUTTON3: length 76.4
  TOP w0.254: v1(49.4,38.61) 49.4,38.05 49.46,38 49.46,13.59 49.2,13.33 U5.8 ; U1.37 58.14,61.75 59.31,62.92 v1(59.31,64.26)
  BOTTOM w0.254: v1(49.4,38.61) 62.1,38.61 62.36,38.86 62.36,47.5 60.33,49.53 60.33,63.25 v1(59.31,64.26)
DIAGS: length 63.5
  TOP w0.254: J1.1 22.35,45.21 20.19,45.21 19.69,44.7 19.69,43.32 22.36,40.64 v1(30.1,40.64) ; v1(57.33,62.86) U1.38
  BOTTOM w0.254: v1(30.1,40.64) 33.15,43.69 33.15,50.8 33.4,51.05 39.24,51.05 40.26,52.07 40.26,55.88 40.51,56.13 48.13,56.13 48.39,56.39 48.39,60.45 50.8,62.86 v1(57.33,62.86)
EL_CONTROL1: length 124.1
  TOP w0.508: v1(135.25,37.59) Q11.1 ; R57.1 81.28,61.59 81.91,60.96 v1(81.91,53.34) ; v1(99.69,34.92) R45.1
  BOTTOM w0.508: v1(135.25,37.59) 133.22,35.56 124.46,35.56 117.47,42.54 100.2,42.54 ; 100.2,42.54 99.69,42.04 v1(99.69,34.92) ; 100.2,42.54 100.2,42.67 99.69,43.18 82.55,43.18 81.91,43.81 v1(81.91,53.34)
EL_CONTROL2: length 118
  TOP w0.254: R44.1 83.69,41.91 83.57,41.78
  TOP w0.508: v1(83.19,57.15) 83.19,62.86 81.91,64.13 R58.1 ; v1(98.42,12.7) 98.42,34.42 97.92,34.92 90.42,34.92 83.19,42.16 v1(83.19,44.7) ; Q12.1 v1(125.86,10.92)
  BOTTOM w0.508: v1(125.86,10.92) 118.24,10.92 111.76,4.45 100.33,4.45 98.42,6.35 v1(98.42,12.7) ; v1(83.19,44.7) v1(83.19,57.15)
EL_CURRENT: length 37.4
  TOP w0.254: R52.2 93.57,48.11 93.09,47.62 90.17,47.62 88.9,48.89 C15.1 66.67,48.89 65.02,50.55 U1.23
  TOP w0.508: U3.7 95.48,51.43 R52.2
EL_ENCODER1: length 37.2
  TOP w0.254: U4.8 79.31,79.69 78.61,78.99 75.31,78.99 74.04,77.72 74.04,66.8 73.03,65.79 64.9,65.79 64.64,65.53 64.64,58.12 64.39,57.86 U1.32
EL_ENCODER2: length 34
  TOP w0.254: U4.6 73.47,81.79 72.77,81.09 72.77,68.26 72.2,67.69 64.01,67.69 63.12,66.8 63.12,63.75 62.87,63.5 60.02,63.5 59.77,63.25 U1.35
EL_M+: length 95.3
  TOP w0.762: 130.68,18.29 133.22,18.29 133.35,18.41 ; 130.68,18.29 132.08,19.68 133.99,19.68 ; 130.68,18.29 130.05,18.29 ; 117.22,18.16 118.75,16.64 120.65,16.64 ; 117.22,18.16 Q8.4 ; 117.22,18.16 115.57,16.51 115.57,14.6 ; 117.22,18.16 117.22,17.4 ; 132.08,22.22 131.44,21.59 131.44,19.68 130.05,18.29 ; 117.22,19.43 117.22,21.84 116.84,22.22 ; 117.22,19.43 118.75,20.95 118.75,22.22 ; 117.22,19.43 117.22,19.3 ; Q8.4 117.22,19.3 ; Q8.4 116.46,18.29 ; Q8.4 118.75,19.81 120.65,19.81 ; 117.22,19.3 115.57,20.95 115.57,22.22 ; 129.79,18.29 128.27,19.81 128.27,21.72 ; 129.79,18.29 Q12.4 ; 129.79,18.29 129.03,18.29 ; 117.47,13.97 117.22,14.22 117.22,17.4 ; 129.92,17.4 129.92,14.86 130.18,14.6 ; 129.92,17.4 131.44,15.88 131.44,14.6 ; 129.92,17.4 129.92,17.53 ; 129.92,18.16 131.44,16.64 133.35,16.64 ; 129.92,18.16 129.92,17.53 ; 129.92,18.16 Q12.4 ; 116.46,18.29 114.94,19.81 113.66,19.81 ; 116.46,18.29 113.79,18.29 113.66,18.41 ; 129.92,17.53 128.27,15.88 128.27,13.97 ; 109.58,19.43 D24.A ; D24.A 111.12,20.92 ; D24.A 112.67,19.43 ; 129.54,22.22 129.92,21.84 Q12.4 ; Q12.4 130.05,18.29 ; 117.22,17.4 118.75,15.88 118.75,14.6 ; 129.03,18.29 127.63,19.68 126.37,19.68 ; 129.03,18.29 126.49,18.29 126.37,18.41 ; 122.28,19.81 D26.C ; D26.C 125.37,19.81 ; D26.C 123.83,21.3
  TOP w3.048: J8.2 138.4,23.47 135.25,20.32
EL_M-: length 106
  TOP w0.508: 118.36,30.23 121.03,30.23 121.28,30.48 ; 118.36,30.23 117.86,30.23 ; 118.36,30.23 120.02,28.57 121.28,28.57 ; 134.62,31.75 132.72,31.75 131.19,30.23 ; 117.73,30.86 Q7.4 ; 117.73,30.86 117.73,34.04 117.47,34.29 ; 117.73,30.86 116.2,32.38 116.2,34.29 ; Q7.4 117.86,30.23 ; Q7.4 117.73,30.1 ; Q7.4 117.09,30.23 ; 130.18,26.67 130.43,26.92 130.43,28.96 ; 117.73,29.46 117.73,26.29 117.47,26.03 ; 117.73,29.46 116.2,27.94 116.2,26.67 ; 117.73,29.46 117.73,29.59 ; 129.16,30.23 127.38,30.23 127,29.84 ; 129.16,30.23 129.79,30.23 ; 129.16,30.23 127.63,28.7 127,28.7 ; 113.66,28.57 116.2,28.57 117.73,30.1 ; 117.73,29.59 119.38,27.94 119.38,26.03 ; 117.73,29.59 117.73,30.1 ; 130.43,28.96 132.08,27.3 132.08,26.03 ; 130.43,28.96 Q11.4 ; 131.19,30.23 Q11.4 ; 131.19,30.23 133.73,30.23 133.99,30.48 ; Q11.4 129.79,30.23 ; Q11.4 132.08,28.57 133.99,28.57 ; Q11.4 128.91,28.7 128.91,26.8 ; 129.79,30.23 128.27,31.75 127,31.75 ; 117.86,30.23 119.38,31.75 119.38,34.29 ; 117.09,30.23 115.57,31.75 114.3,31.75 ; 117.09,30.23 114.05,30.23 113.66,29.84 ; 130.43,30.86 130.43,33.4 130.18,33.66 ; J8.1 135.89,27.43
  TOP w0.762: D25.C 125.37,28.7 ; D25.C 122.28,28.7 ; D25.C 123.83,27.22 ; 128.91,33.66 128.91,32.38 130.43,30.86 130.43,30.73 ; 137.62,28.88 J8.1 ; J8.1 137.62,25.98 ; J8.1 139.06,28.88 ; Q11.4 130.43,30.73 ; 130.43,30.73 132.08,32.38 132.08,33.66 ; 109.58,29.08 D19.A ; D19.A 112.67,29.08 ; D19.A 111.12,27.6
EXT_LED: length 70.9
  TOP w0.254: v1(32.89,37.59) 32.89,18.8 33.15,18.54 35.88,18.54 36,18.41 U5.3 ; U1.26 61.24,52.98 61.06,52.8 61.06,50.07 v1(63.12,48.01)
  BOTTOM w0.254: v1(32.89,37.59) 62.87,37.59 63.12,37.85 v1(63.12,48.01)
FT232_NRST: length 17.2
  TOP w0.254: U2.19 20.77,90.53 20.67,90.42 20.45,90.42 17.4,87.38 R19.1 15.62,87.88 15.62,88.39 15.37,88.65 12.32,88.65 11.81,89.15 11.81,91.44 12.83,92.46 R29.2
I2C_CLK: length 84.8
  TOP w0.254: v1(43.56,62.23) 52.2,62.23 52.45,61.98 U1.44 ; J4.9 24.77,11.84 R12.2 21.84,13.11 21.59,13.36 v1(21.59,37.34)
  BOTTOM w0.254: v1(21.59,37.34) 22.48,37.34 28.58,43.43 29.15,43.43 31.37,45.66 31.37,53.09 31.62,53.34 38.48,53.34 38.73,53.59 38.73,61.72 39.24,62.23 v1(43.56,62.23)
I2C_DAT: length 74.1
  TOP w0.254: v1(25.4,37.59) 25.4,13.36 25.65,13.11 R11.2 26.67,12.22 27.3,11.58 J4.8 ; v1(44.58,58.67) U1.1
  BOTTOM w0.254: v1(44.58,58.67) 40.26,58.67 39.37,57.78 39.37,52.32 39.12,52.07 32.38,52.07 32.13,51.82 32.13,45.15 29.15,42.16 28.7,42.16 25.4,38.86 v1(25.4,37.59)
NAZ_CONTROL1: length 10.3
  TOP w0.381: R55.2 60.33,40.64 59.69,41.27 59.69,43.31 58.14,44.86 U1.19
NAZ_CONTROL2: length 7
  TOP w0.381: R56.2 61.05,43.18 58.95,45.28 U1.20
NEL_CONTROL1: length 9.6
  TOP w0.381: U1.30 65.38,56.24 66.04,56.9 66.04,60.96 66.67,61.59 R57.2
NEL_CONTROL2: length 11.4
  TOP w0.381: U1.31 65.02,57.05 65.41,57.43 65.41,63.5 66.04,64.13 R58.2
NSTAT_LED: length 44.1
  TOP w0.254: U1.25 64.24,52.17 67.44,55.37 v1(77.6,55.37) ; D1.C 79.25,71.42 79.12,71.3 79.12,66.8 79.88,66.04 82.42,66.04 85.47,62.99 v1(85.47,60.96)
  BOTTOM w0.254: v1(77.6,55.37) 77.6,58.67 79.88,60.96 v1(85.47,60.96)
PGC/U2RX: length 57.9
  TOP w0.254: U1.22 60.58,46.48 v1(61.59,45.47) ; 22.73,46.86 22.35,47.24 20.19,47.24 19.69,47.75 19.69,50.29 20.75,51.36 27.51,51.36 28.57,50.29 32.89,50.29 33.66,49.53 47.62,49.53 49.4,47.75 v1(49.4,43.69)
  BOTTOM w0.254: v1(61.59,45.47) 60.83,44.7 50.42,44.7 v1(49.4,43.69)
PGD/U2TX: length 46.1
  TOP w0.254: J1.3 22.99,44.58 22.99,42.67 23.49,42.16 45.21,42.16 45.72,42.67 45.72,44.45 45.97,44.7 v1(48.13,44.7) ; v1(60.07,45.47) 60.07,46.02 59.77,46.33 U1.21
  BOTTOM w0.254: v1(60.07,45.47) 48.89,45.47 v1(48.13,44.7)
RX_FROM_PC: length 36
  TOP w0.254: U1.2 v1(45.8,57.86) ; v1(43.56,81.28) R21.2
  BOTTOM w0.254: v1(43.56,81.28) 43.56,76.45 45.72,74.3 45.72,63.5 45.8,63.42 v1(45.8,57.86)
TX_TO_PC: length 39.5
  TOP w0.254: v1(44.58,83.82) R22.2 ; v1(46.99,57.05) U1.3
  BOTTOM w0.254: v1(44.58,83.82) 44.58,77.34 46.99,74.93 46.99,58.11 46.59,57.71 46.59,57.44 v1(46.99,57.05)
USB_D+: length 6.7
  TOP w0.254: U2.15 22.91,93.13 23.03,93 23.39,93 24.89,94.5 24.89,96.16 24.77,96.28 J5.3
USB_D-: length 7.4
  TOP w0.254: J5.2 25.41,96.28 25.29,96.16 25.29,94.33 23.56,92.6 23.03,92.6 22.91,92.48 U2.16
N09584: length 6.4
  TOP w0.254: U1.7 44.04,53.8 43.99,53.85 C6.2
N10882: length 6.7
  TOP w0.254: U2.1 30.26,84.67 30.48,84.45 31.12,84.45 R21.1
N10888: length 6.7
  TOP w0.254: R22.1 30.84,87.27 U2.5
N11711: length 6.4
  TOP w0.254: U2.17 20.77,91.83 20.64,91.69 19.94,91.69 18.16,89.92 C12.1
N15288: length 16.2
  TOP w0.254: J5.1 26.06,98.27 25.79,98.55 17.65,98.55 16.13,97.03 R29.1
N17212: length 15.9
  TOP w0.254: R27.1 19.18,79.76 19.18,86.33 20.77,87.92 U2.23
N17635: length 16
  TOP w0.254: R28.1 18.41,77.47 18.41,86.22 20.77,88.57 U2.22
N18224: length 8.4
  TOP w0.254: U2.3 28.02,85.97 27.56,85.51 27.56,84.33 30.61,81.28 30.61,80.77 TP1.1
N18573: length 2.8
  TOP w0.254: R28.2 14.25,73.96 14.35,73.86 D3.C
N19574: length 7
  TOP w0.254: TP2.1 22.7,95 24.12,96.42 J5.4
N20299: length 13.3
  TOP w0.254: J5.SH7 J5.SH6 J5.SH5 J5.SH4
  TOP w0.508: J5.SH3 31.79,96.52 R30.1
N21472: length 6.4
  TOP w0.254: U2.11 30.22,91.18 33.02,93.98 R23.1
N21714: length 5.7
  TOP w0.254: U2.9 30.77,89.88 31.75,88.9 R24.1
N21744: length 5.6
  TOP w0.254: U2.10 30.84,90.53 31.75,91.44 R25.1
N21774: length 5.9
  TOP w0.254: R26.1 32.38,86.36 30.82,87.92 U2.6
N22307: length 2.8
  TOP w0.254: D2.C 21.46,73.86 21.36,73.96 R27.2
N32112: length 103.7
  TOP w0.508: v1(107.31,54.61) R39.1
  TOP w0.762: R35.1 141.61,61.14 ; R35.1 140.66,60.2 ; R35.1 142.55,60.2 ; 133.04,60.2 R37.1 ; R37.1 134.93,60.2 ; R37.1 133.99,61.14 ; 131.32,65.28 Q6.3 ; Q6.3 132.21,64.19 ; Q6.3 133.1,65.28 ; 136.85,60.2 R36.1 ; R36.1 137.8,61.14 ; R36.1 138.74,60.2 ; 130.18,61.14 R38.1 131.12,60.2
  TOP w1.27: 130.18,62.1 v1(125.73,62.1) 123.83,64.01 D23.A ; D22.A 123.83,89.83 125.95,91.95 Q5.3
  TOP w3.048: 139.7,64.01 142.88,67.18 142.88,91.31 138.43,95.76 130.15,95.76 128.14,93.75 Q5.3
  BOTTOM w0.508: v1(107.31,54.61) 114.94,54.61 122.43,62.1 v1(125.73,62.1)
N33531: length 6.1
  TOP w0.508: R43.1 104.82,50.76 104.82,51.17 R40.2 103.5,52.07 102.87,51.43 101.54,51.43
N33654: length 3.2
  TOP w0.508: R39.2 102.59,53.29 102.44,53.29 101.85,52.7 U3.3
N38974: length 7.9
  TOP w0.381: R31.2 120.02,95.35 Q1.1 123.44,91.95 D4.3
N39239: length 20.1
  TOP w0.381: R32.2 Q2.1 v1(113.66,64.01)
  TOP w0.508: D7.3 v1(102.23,60.2)
  BOTTOM w0.381: v1(113.66,64.01) 113.66,62.74
  BOTTOM w0.508: v1(102.23,60.2) 111.12,60.2 113.66,62.74
N40124: length 3.4
  TOP w0.508: Q4.B 97.16,60.35 97.56,60.76 R34.2
N43524: length 29.9
  TOP w0.508: 121.11,37.59 121.92,36.78 v1(121.92,36.19) ; 121.11,37.59 121.62,38.1 R41.2 ; 121.11,37.59 Q7.1 ; D10.3 100.84,40 v1(101.98,38.86)
  BOTTOM w0.508: v1(121.92,36.19) 117.47,40.64 103.76,40.64 v1(101.98,38.86)
N43572: length 20.1
  TOP w0.381: R42.2 Q8.1 v1(113.66,9.65)
  TOP w0.508: D13.3 v1(102.23,5.84)
  BOTTOM w0.381: v1(113.66,9.65) 113.66,8.38
  BOTTOM w0.508: v1(102.23,5.84) 111.12,5.84 113.66,8.38
N43662: length 3.4
  TOP w0.508: Q10.B 97.16,5.99 97.56,6.4 R45.2
N43806: length 128.6
  TOP w0.508: R50.1 88.14,54.61 87.63,54.1 v1(87.63,51.05)
  TOP w0.762: 122.81,33.4 D25.A 123.89,33.4 126.92,36.44 126.92,36.83 ; R46.1 142.55,42.67 ; R46.1 140.66,42.67 ; R46.1 141.61,41.73 ; 133.99,41.73 R48.1 ; R48.1 134.93,42.67 ; R48.1 133.04,42.67 ; 127.25,37.59 Q11.3 ; Q11.3 129.03,37.59 ; Q11.3 128.14,38.68 ; R47.1 138.74,42.67 ; R47.1 137.8,41.73 ; R47.1 136.85,42.67 ; Q12.3 132.21,9.78 130.18,7.75 125.73,7.75 123.83,9.65 D26.A ; 130.18,41.73 R49.1 ; R49.1 131.12,42.67 ; R49.1 129.23,42.67
  TOP w3.048: Q12.3 132.97,10.16 139.06,10.16 142.88,13.97 142.88,38.1 140.97,40 140.97,40.64
  BOTTOM w0.508: v1(128.27,40.64) 121.92,40.64 113.03,49.53 89.15,49.53 v1(87.63,51.05)
N43998: length 3.3
  TOP w0.508: R50.2 94.93,54.61 95.57,53.97 U3.5
N44064: length 6.7
  TOP w0.254: R51.2 92.25,50.75 92.25,50.34 R52.1
  TOP w0.508: 96.58,52.7 95.25,52.7 94.61,52.07 R51.2
N46355: length 3.9
  TOP w0.381: D4.1 124.76,94.68 124.56,94.88 Q3.C
N46827: length 3.6
  TOP w0.381: D7.1 100.58,56.77 100.31,57.04 100.31,58.28 99.99,58.6 Q4.C
N47330: length 2.2
  TOP w0.381: D10.1 Q9.C
N47554: length 3.6
  TOP w0.381: Q10.C 99.99,4.24 100.31,3.92 100.31,2.68 100.58,2.41 D13.1
N52322: length 10.9
  TOP w0.254: U4.1 71.75,88.14 ; 71.75,88.14 70.99,87.38 R2.2 ; 71.75,88.14 J2.3
N52332: length 14.9
  TOP w0.254: J2.2 69.22,93.98 68.71,93.47 68.71,85.95 R3.2 69.98,84.84 70.74,85.6 U4.3
N53909: length 32.7
  TOP w0.254: v1(72.01,82.55) 72.52,83.06 U4.5 ; v1(82.42,80.52) 84.45,82.55 R7.2 88.77,83.67 88.77,92.71 J3.3
  BOTTOM w0.254: v1(72.01,82.55) 74.04,80.52 v1(82.42,80.52)
N53913: length 19
  TOP w0.254: U4.9 82.17,81.79 85.47,85.09 R8.2 87.5,85.24 87.5,93.22 87.76,93.47 J3.2
N58839: length 7.8
  TOP w0.254: R16.1 31.75,15.24 33.66,17.14 U5.4
N59824: length 6.8
  TOP w0.254: R16.2 J4.7
N60320: length 49.2
  TOP w0.254: v1(44.32,17.02) 42.86,17.02 42.74,17.14 U5.11 41.53,17.14 ; R13.2 50.42,4.45 50.16,4.19 50.16,3.17 48.89,1.9 33.02,1.9 32.38,2.54 J4.6 32.38,14.6 33.39,15.61 33.51,15.61 v1(33.91,16)
  BOTTOM w0.254: v1(33.91,16) 34.42,16.51 43.81,16.51 v1(44.32,17.02)
N60420: length 36.2
  TOP w0.254: R14.2 49.78,6.98 49.53,6.73 49.53,3.81 48.26,2.54 35.81,2.54 34.92,3.43 J4.5 33.66,7.62 33.66,14.35 35.18,15.88 36.89,15.88
N60515: length 34.6
  TOP w0.254: R15.2 49.15,9.52 48.89,9.27 48.89,4.45 47.62,3.17 38.1,3.17 37.46,3.81 J4.4 37.46,8 37.72,8.25 39.37,8.25 40,8.89 40,14.35 40.26,14.6 U5.9
N87563: length 2.8
  TOP w0.254: D1.A 81.25,73.86 81.28,73.89 R6.1
N90499: length 7.6
  TOP w0.762: J9.2 57.78,92.2 57.78,87.5
N92108: length 2.8
  TOP w0.254: R53.1 34.42,73.89 34.39,73.86 D18.A
N94087: length 2.8
  TOP w0.254: R54.1 103.89,45.44 103.91,45.42 D27.A
N100934: length 52.6
  TOP w0.254: U1.12 52.45,44.96 52.2,44.7 52.2,22.1 53.21,21.08 65.66,21.08 66.04,20.7 TP3.1
N100938: length 54.9
  TOP w0.254: TP4.1 68.58,21.21 68.2,21.59 53.47,21.59 52.7,22.35 52.7,44.2 53.26,44.75 U1.13
N101010: length 40
  TOP w0.254: U1.4 16.54,56.24 16.13,56.64 16.13,57.91 15.88,58.17 TP6.1
N101014: length 38.5
  TOP w0.254: U1.5 15.82,55.42 15.62,55.63 TP7.1
N101036: length 76.1
  TOP w0.254: v1(59.31,66.04) 59.31,70.61 59.05,70.87 46.86,70.87 46.61,70.61 46.61,65.53 46.1,65.02 7.49,65.02 7.24,64.77 6.98,64.77 J10.7 ; U1.33 63.65,58.67 64.14,59.16 64.14,60.45 v1(63.37,61.21)
  BOTTOM w0.254: v1(63.37,61.21) 63.37,65.79 63.12,66.04 v1(59.31,66.04)
N101076: length 54.5
  TOP w0.254: J10.6 6.66,61.59 7.24,62.18 7.24,63.5 8.36,64.62 46.27,64.62 46.45,64.8 54.71,64.8 54.89,64.62 U1.41
N101098: length 55.5
  TOP w0.254: U1.42 54.08,64.16 53.9,64.34 46.57,64.34 46.44,64.21 8.97,64.21 8,63.25 8,59.44 7.75,59.18 6.48,59.18 J10.5
N101120: length 58
  TOP w0.254: 7.24,56.64 6.55,55.95 6.19,55.95 6.17,55.98 6.17,56.34 J10.4 ; 7.24,56.64 8.51,56.64 8.76,56.9 8.76,62.99 9.47,63.7 53.01,63.7 53.26,63.45 U1.43 ; 7.24,56.64 6.48,56.64
N101276: length 45.3
  TOP w0.254: U1.10 49.38,51.36 49.37,51.37 30.29,51.37 28.58,53.09 8.76,53.09 8.51,53.34 8.51,53.59 8,54.1 6.48,54.1 J10.3
N101280: length 44.9
  TOP w0.254: U1.11 45.34,50.55 45.09,50.8 29.59,50.8 28.22,52.17 7.09,52.17 J10.2
N101284: length 57.2
  TOP w0.254: TP16.1 71.12,21.72 70.74,22.1 53.72,22.1 53.21,22.61 53.21,43.94 54.08,44.81 U1.14
N101288: length 59.4
  TOP w0.254: TP17.1 73.66,21.97 73.03,22.61 53.97,22.61 53.72,22.86 53.72,43.69 54.89,44.86 U1.15
N120965: length 3.2
  TOP w0.381: Q3.B 121.17,98.91 120.56,98.3 R33.2
N120971: length 4.3
  TOP w0.254: Q9.B 90.81,41.88 90.78,41.91 R44.2
  TOP w0.381: 93.96,42.11 93.98,42.09 Q9.B
N126718: length 28.2
  TOP w0.254: v1(35.18,20.83) 35.88,20.83 36,20.95 36.89,20.95 ; J4.2 v1(42.55,8.64)
  BOTTOM w0.254: v1(35.18,20.83) 32.89,20.83 32.64,20.57 32.64,9.14 33.15,8.64 v1(42.55,8.64)
N126733: length 18.9
  TOP w0.254: v1(43.81,11.43) 40,7.62 J4.3 ; v1(43.81,19.43) 43.56,19.68 U5.13
  BOTTOM w0.254: v1(43.81,11.43) 45.59,13.21 45.59,18.8 44.96,19.43 v1(43.81,19.43)

## Copper pours and planes (outline as drawn; the poured copper is in the pictures)
+5V on TOP: 0.25,101.35 100.97,101.35 100.97,0.25 0.25,0.25 ; 15 cut-outs
+24V on TOP: 104.78,94.49 116.84,94.49 117.47,93.85 117.47,90.68 116.84,90.04 113.66,90.04 113.03,89.41 113.03,86.87 111.76,85.6 109.22,85.6 107.95,84.33 107.95,72.9 109.22,71.63 109.85,71.63 109.85,64.01 111.12,62.74 116.2,62.74 117.47,64.01 117.47,65.91 118.11,66.55 121.28,66.55 121.92,65.91 121.92,61.47 120.02,59.56 119.89,59.56 118.75,58.42 118.75,59.69 117.47,59.69 117.47,54.61 118.75,54.61 118.75,50.16 120.65,48.26 126.37,48.26 127,47.62 127,41.27 126.37,40.64 118.75,40.64 117.47,39.37 117.47,36.32 116.84,35.69 113.66,35.69 113.03,35.05 113.03,32.51 111.76,31.24 109.22,31.24 107.95,29.97 107.95,18.54 109.22,17.27 109.85,17.27 109.85,16.17 109.75,16.17 109.66,16.13 109.63,16.04 109.63,13.42 109.66,13.33 109.75,13.3 109.85,13.3 109.85,11.68 109.22,11.68 109.13,11.65 109.09,11.56 109.09,10.29 109.13,10.2 109.22,10.16 109.85,10.16 109.85,9.65 111.12,8.38 116.2,8.38 117.47,9.65 117.47,11.56 118.11,12.19 121.28,12.19 121.92,11.56 121.92,7.11 120.02,5.21 106.05,5.21 102.23,9.02 102.23,37.59 104.78,40.13 107.95,40.13 109.22,41.4 109.22,55.88 102.23,62.86 102.23,91.95
0 on TOP: 142.88,57.78 121.92,57.78 120.65,56.52 120.65,52.7 121.92,51.43 127,51.43 128.27,50.16 128.27,45.08 142.88,45.08 144.14,46.35 144.14,56.52
0 on BOTTOM: 0.25,101.35 100.97,101.35 100.97,0.25 0.25,0.25
AZ_M+ on TOP: 136.53,77.98 109.85,77.98 108.59,76.71 108.59,74.17 109.85,72.9 112.39,72.9 113.66,71.63 113.66,69.09 114.94,67.82 120.02,67.82 121.28,69.09 121.28,71.63 122.56,72.9 125.09,72.9 126.37,71.63 126.37,69.09 127.63,67.82 135.25,67.82 136.53,69.09
AZ_M- on TOP: 108.59,83.06 108.59,80.52 109.85,79.25 135.25,79.25 135.29,79.25 136.53,79.88 138.94,80.16 139.92,80.68 140.33,81.15 140.33,88.14 139.06,89.41 127.63,89.41 126.37,88.14 126.37,85.6 125.09,84.33 122.56,84.33 121.28,85.6 121.28,88.14 120.02,89.41 114.94,89.41 113.66,88.14 113.66,85.6 112.39,84.33 109.85,84.33
EL_M+ on TOP: 109.85,23.62 136.53,23.62 136.53,14.73 135.25,13.46 127.63,13.46 126.37,14.73 126.37,17.27 125.26,18.38 125.29,18.42 125.32,18.46 125.32,18.5 125.32,21.12 125.29,21.21 125.2,21.25 122.45,21.25 122.36,21.21 122.33,21.12 122.33,18.5 122.33,18.46 122.36,18.42 122.39,18.38 121.28,17.27 121.28,14.73 120.02,13.46 114.94,13.46 113.66,14.73 113.66,17.27 112.62,18.31 112.62,20.74 112.59,20.83 112.5,20.87 109.75,20.87 109.66,20.83 109.63,20.74 109.63,19.02 109.56,18.92 109.45,18.94 108.59,19.81 108.59,22.35
EL_M- on TOP: 127.63,35.05 139.06,35.05 140.33,33.78 140.33,28.83 137.8,28.83 137.7,28.79 137.67,28.7 137.67,26.16 137.7,26.07 137.8,26.03 138.96,26.03 139.06,25.96 139.01,25.84 138.94,25.81 136.53,25.53 135.29,24.9 135.25,24.89 109.85,24.89 108.59,26.16 108.59,28.7 109.45,29.57 109.56,29.59 109.63,29.5 109.63,27.77 109.66,27.68 109.75,27.65 112.5,27.65 112.59,27.68 112.62,27.77 112.62,30.2 113.66,31.24 113.66,33.78 114.94,35.05 120.02,35.05 121.28,33.78 121.28,31.24 122.39,30.13 122.36,30.1 122.33,30.06 122.33,30.01 122.33,27.39 122.36,27.3 122.45,27.27 125.2,27.27 125.29,27.3 125.32,27.39 125.32,30.01 125.32,30.06 125.29,30.1 125.26,30.13 126.37,31.24 126.37,33.78
N32112 on TOP: 142.88,58.93 128.91,58.93 128.91,62.74 130.18,64.01 130.18,66.55 144.14,66.55 144.14,60.2
N43806 on TOP: 128.27,43.81 142.88,43.81 144.14,42.54 144.14,38.73 130.81,38.73 130.18,38.1 130.18,36.19 126.37,36.19 126.37,39.37 128.27,41.27

## Text on the board
BOTTOM: RADIOTELESCOPE-01
Ref Des/Silkscreen Top: JLCJLCJLCJLC | github.com/drkntz/radiotelescope-PCB | RX | ZACH MARTIN, AARON OLSEN | RADIO TELESCOPE CONTROL SYSTEM | REV1 - 2023 | TX | DISPLAY | +5V | +24V | AZIMUTH | 24V IN | ELEVATION | +5V- | EXPANSION
